# Altium PCB PCBcadcamcuoiki.PcbDoc
Units mm, origin at the board's own origin, x right, y up, seen from the top; angles counter-clockwise.
Board outline 92.58 x 78.87 mm, 2 copper layers (Top Layer, Bottom Layer); 31 components, 20 nets, 74 pads, 0 vias.
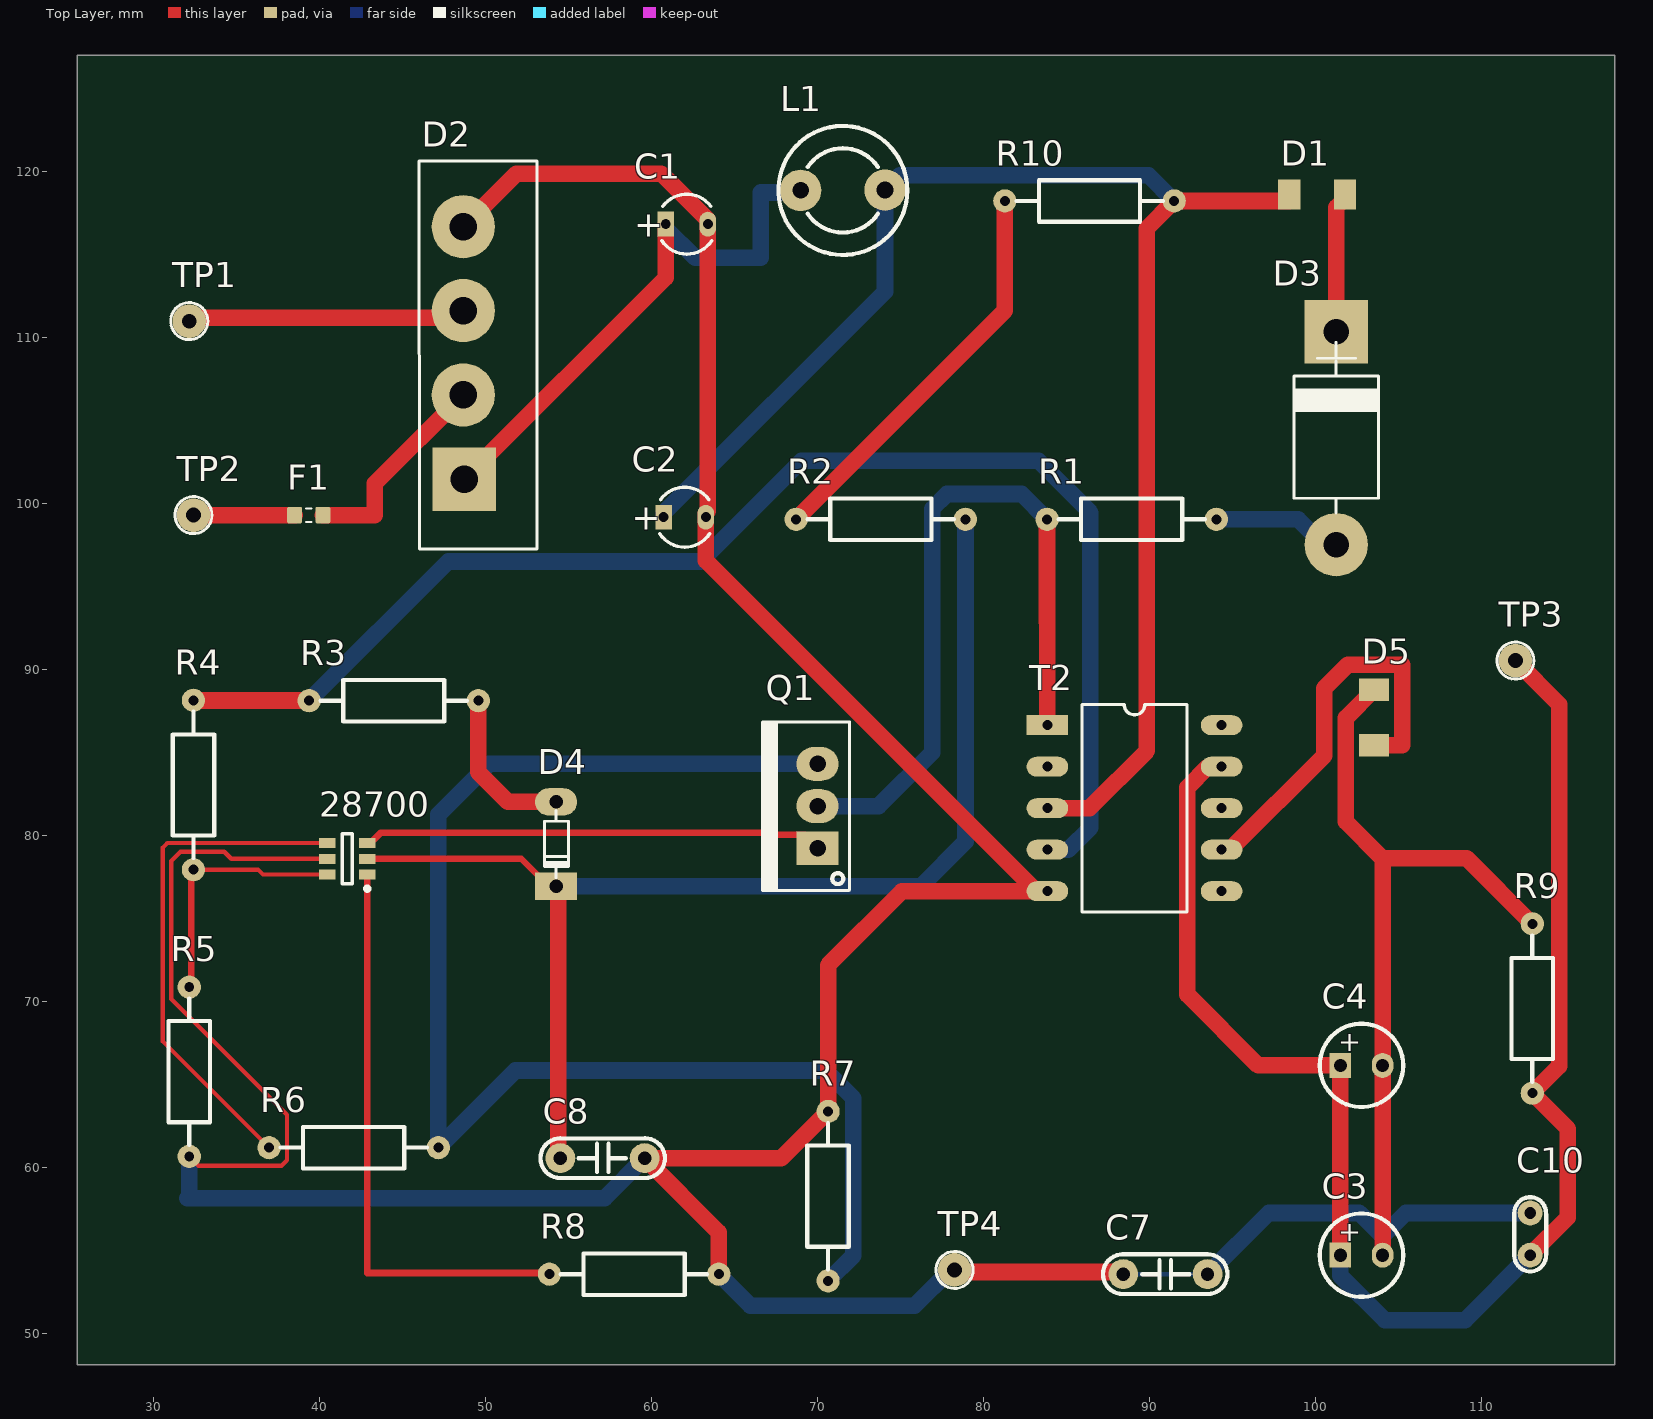
[diagram p0: Top Layer view]
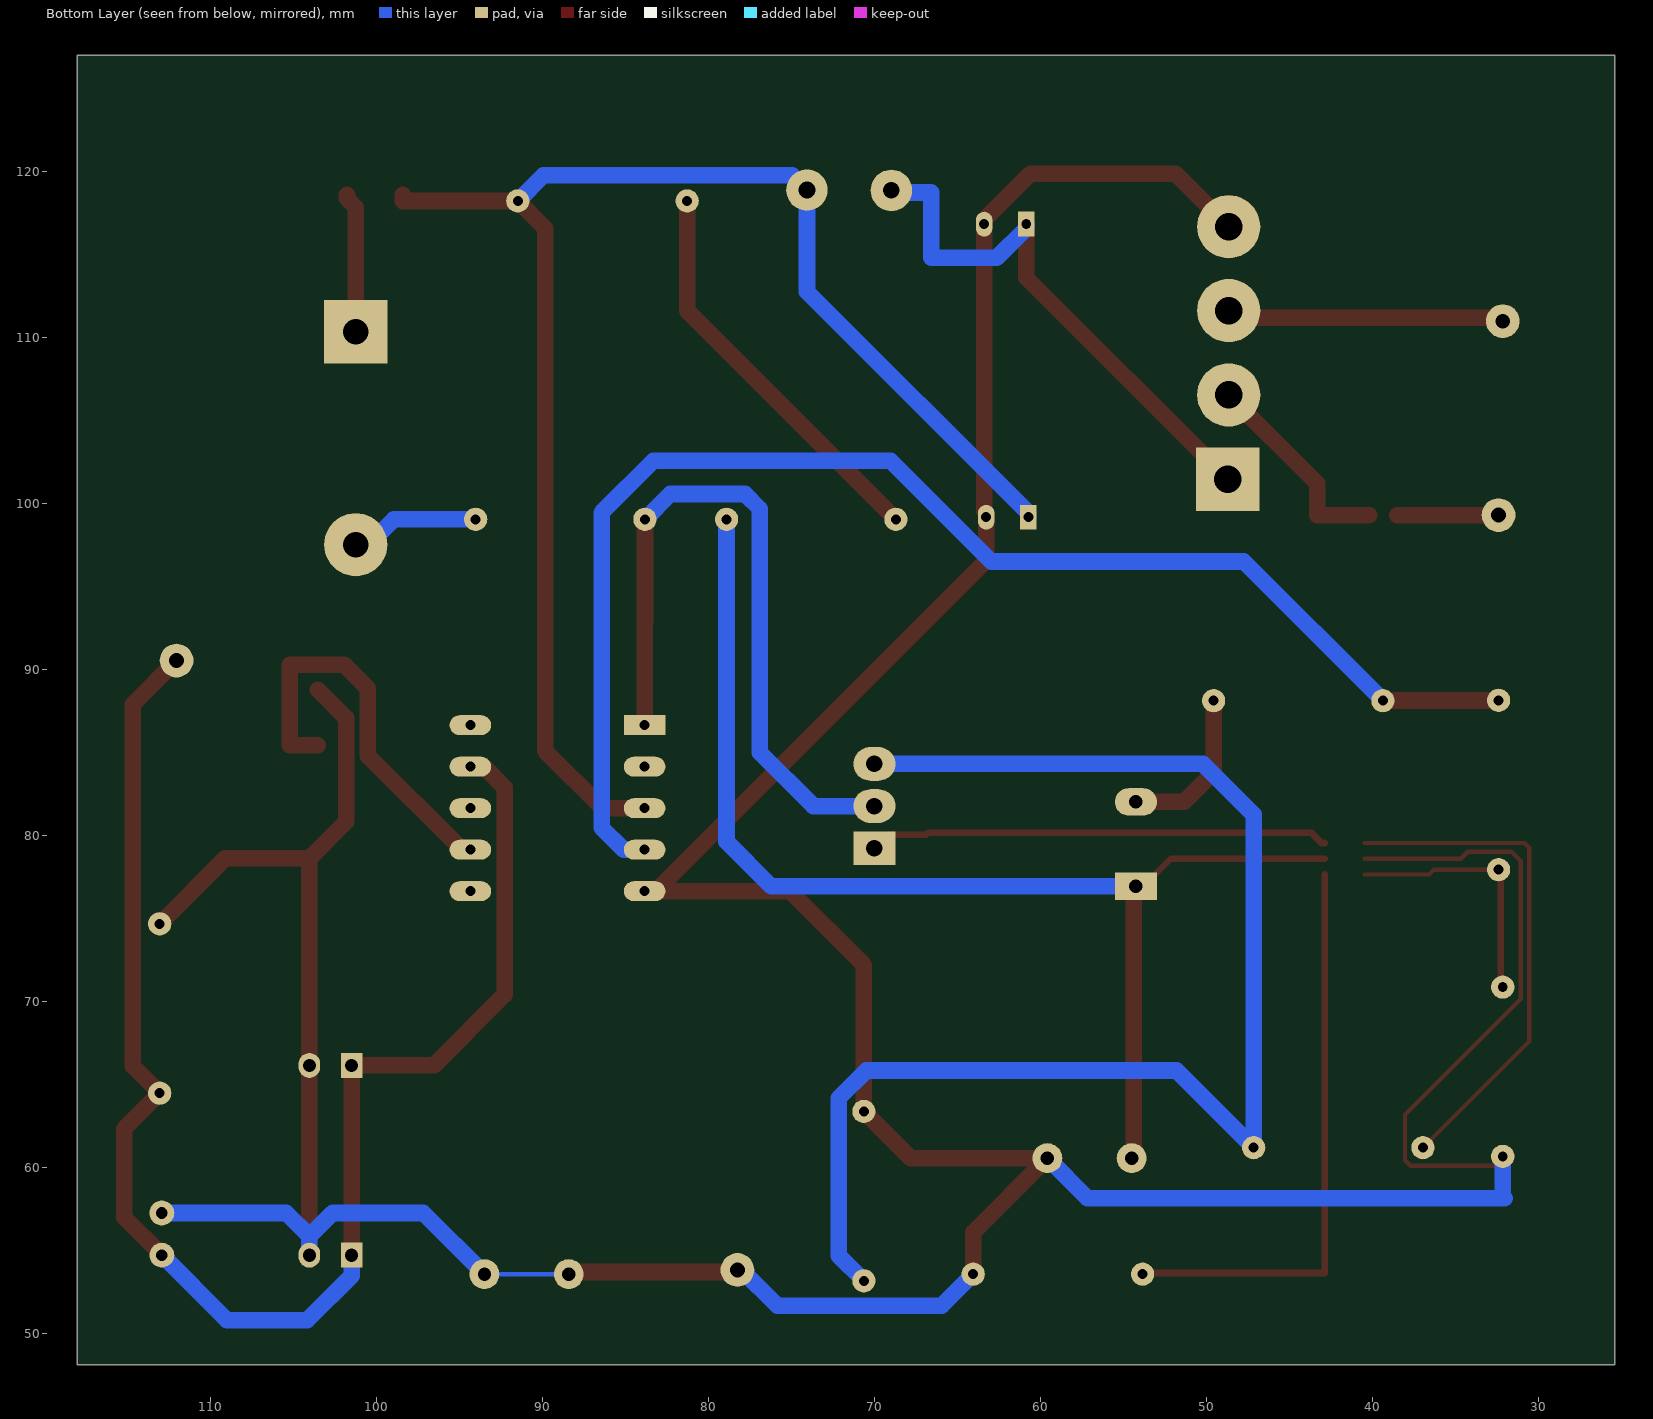
[diagram p1: Bottom Layer view, seen from below]
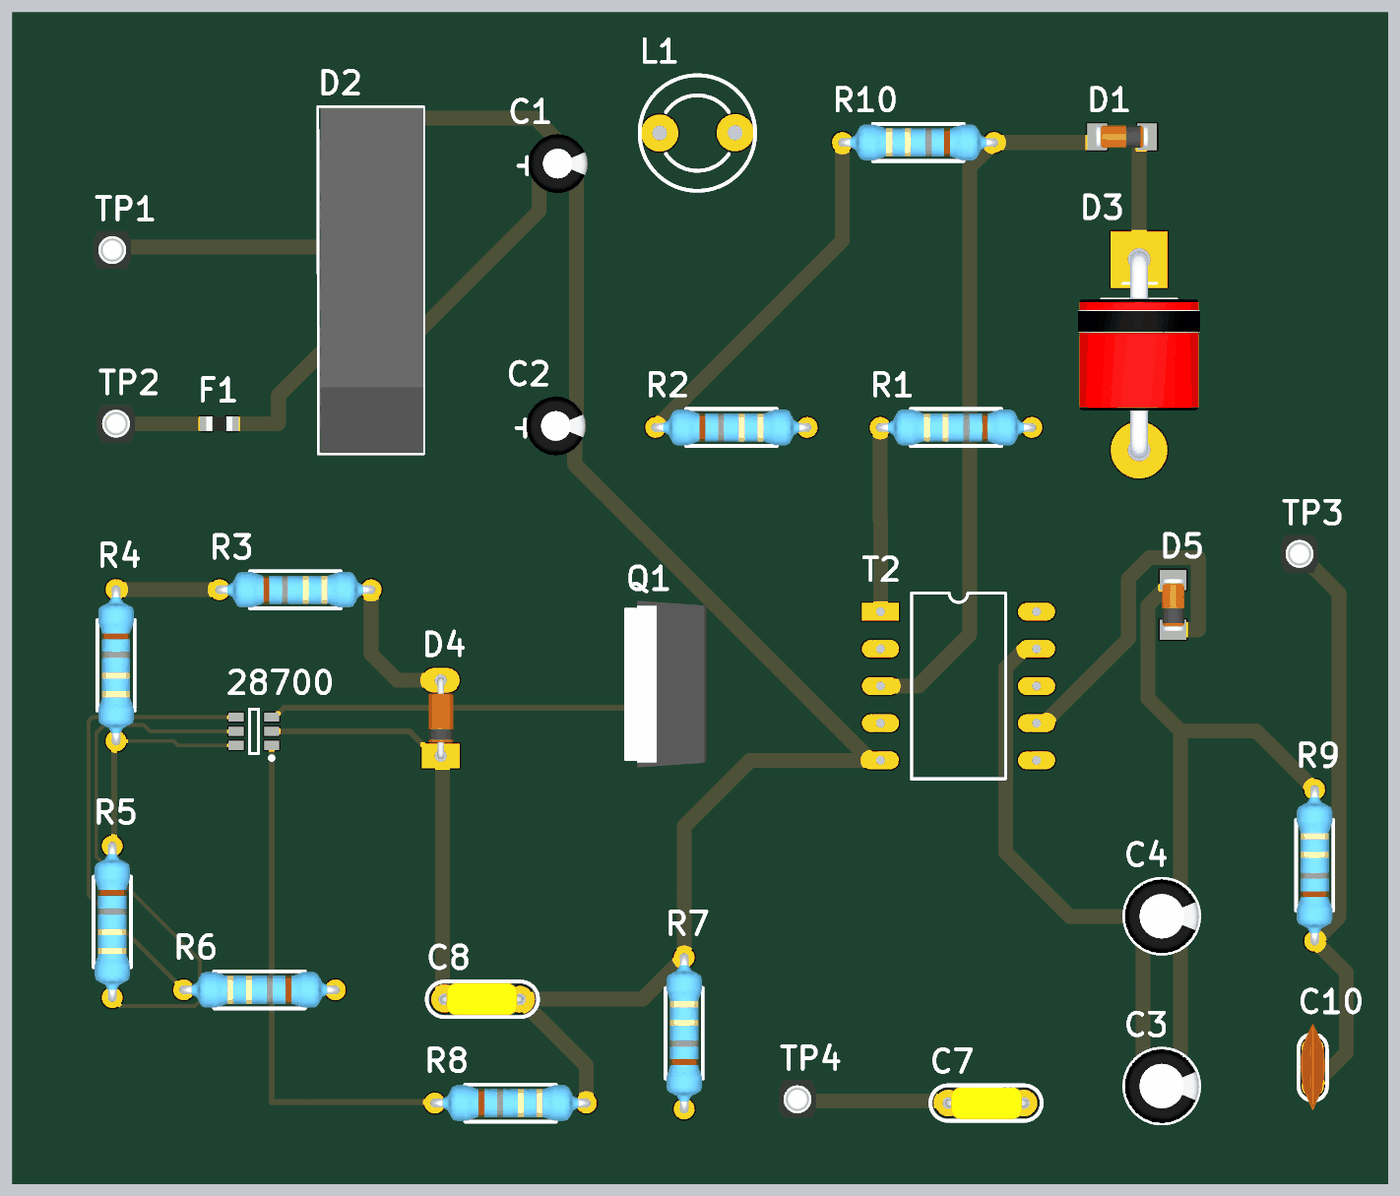
[diagram p2: 3D render of the assembled board from above, using the file's embedded part models]

## Layer stack, top to bottom
Top Solder: solder mask 0.0102, Solder Resist, Dk 3.5
Top Layer: signal copper 0.0356
Dielectric 1: dielectric 0.32, FR-4, Dk 4.8
Bottom Layer: signal copper 0.0356
Bottom Solder: solder mask 0.0102, Solder Resist, Dk 3.5

## Board outline
25.4,48.133 117.983,48.133 117.983,127 25.4,127

## Design rules (kind name [scope] priority, off if disabled: settings)
Clearance [All] p1: gap=0.3 ignorepadtopadclearanceinfootprint=FALSE
PolygonConnect [All] p1: connectstyle=Relief reliefconductorwidth=0.254 reliefentries=4 polygonreliefangle="90 Angle" airgapwidth=0.254
RoutingVias [All] p1: holewidth=0.711 width=1.27 viastyle="Through Hole" minholewidth=0.711 minwidth=1.27 maxholewidth=0.711 maxwidth=1.27
SolderMaskExpansion [All] p1: expansion=0.102 istentingtop=FALSE
Width [All] p1: maxlimit=1.5 minlimit=0.4 preferedwidth=1 bottomlayer_minwidth=0.5 minimp=50.000000 maximp=50.000000 favimp=50.000000
30 further rules are at their usual default settings.

## Components (designator, comment, footprint, x,y, rotation, side; value= is the part's Value field where it differs from the comment)
28700 "28700" SOT23(1) 41.656,78.613 r180 top
C1 "6.8uF 400V" C3MM 62.103,116.84 r0 top
C2 "6.8uF 400V" C3MM 61.976,99.187 r0 top
C3 "100uF 10V" C5mm 102.743,54.737 r0 top
C4 "1000uF 10V" C5mm 102.743,66.167 r0 top
C7 "220pF" "tu tantalum dip5.08" 90.932,53.594 r180 top
C8 "330nF" "Tu tantalum dip5.08" 57.023,60.579 r0 top
C10 "0.01uF" "tu gom" 112.903,56.007 r90 top
D1 "SMAJ120A" "DIODE ZENNER SMD SOD80" 100.076,118.618 r180 top
D2 "RH06-T" "DIODE CAU 10A CAM" 48.641,101.473 r90 top
D3 "MRA4007" "DIODE 7A" 101.219,103.378 r270 top
D4 "1N4148" "DIODE 0.5A" 54.229,79.502 r90 top
D5 "CDBC340" "DIODE ZENNER SMD SOD80" 103.505,87.122 r90 top
F1 "Fast Acting" RESC1608X55N 39.331,99.314 r0 top value=500mA
L1 "" "CUON CAM 200mil" 71.501,118.872 r0 top
Q1 "AOD2N60" QTO-220 69.977,79.248 r90 top value=IRF840
R1 "100" "tro vach 1/4w" 88.9,99.06 r0 top
R2 "10M" "tro vach 1/4w" 73.787,99.06 r180 top
R3 "49.9k" "tro vach 1/4w" 44.45,88.138 r180 top
R4 "100k" "tro vach 1/4w" 32.385,83.058 r90 top
R5 "28k" "tro vach 1/4w" 32.131,65.786 r90 top
R6 "2.8k" "tro vach 1/4w" 42.037,61.214 r0 top
R7 "1.3k" "tro vach 1/4w" 70.612,58.293 r270 top
R8 "49.9K" "tro vach 1/4w" 58.928,53.594 r180 top
R9 "2.61k" "tro vach 1/4w" 113.03,69.596 r270 top
R10 "10M" "tro vach 1/4w" 86.36,118.237 r0 top
T2 "750817011" 750817011 83.82,86.661 r0 top
TP1 "TP" TP1 32.131,110.998 r0 top value="Test Point"
TP2 "TP" TP1 32.385,99.314 r0 top value="Test Point"
TP3 "" TP1 112.014,90.551 r0 top value="Test Point"
TP4 "" TP1 78.232,53.848 r0 top value="Test Point"

## Footprints (in the part's own frame and the unit in brackets; to place one, negate y for a bottom-side part, rotate by r counter-clockwise, add the part's x,y. Pads: shape width x height; smd on the part's side, far side on the other; paste and mask are expansions set on the pad)
750817011 [mm]
  rect 2.5x1.2 hole 0.6: 1(0,0)
  oval 2.5x1.2 hole 0.6: 2(0,-2.5) 3(0,-5) 4(0,-7.5) 5(0,-10) 6(10.5,-10) 7(10.5,-7.5) 8(10.5,-5) 9(10.5,-2.5) 10(10.5,0)
  silkscreen extent 2.08,-11.25 8.42,1.25
C3MM [mm]
  rect 1x1.5 hole 0.6: 1(-1.27,0)
  oval 1x1.5 hole 0.6: 2(1.27,0)
  silkscreen extent -1.5,-1.81 1.5,1.8, body extent -2,-2.03 1.99,1.97, height 7.01
C5mm [mm]
  rect 1.3x1.5 hole 0.8: 1(-1.27,0)
  oval 1.3x1.5 hole 0.8: 2(1.27,0)
  silkscreen extent -2.51,-2.51 2.51,2.51, body extent -2.5,-2.5 2.49,2.5, height 11.01
"CUON CAM 200mil" [mm]
  round 2.5 hole 1: 1(-2.54,0) 2(2.54,0.025)
  silkscreen extent -3.88,-3.89 3.89,3.89
"DIODE 0.5A" [mil] "Diode muoi, xung"
  oval 65x100 hole 32: 1(100,0)
  rect 65x100 hole 32: 2(-100,0)
  silkscreen extent -80,-30 80,28, body extent -108,-33 108,32, height 61
"DIODE 7A" [mil] "Diode 7A"
  round 150 hole 60: 1(230,0)
  rect 150x150 hole 60: 2(-275,0)
  silkscreen extent -250,-100 155,100, body extent -296,-161 251,161, height 319
"DIODE CAU 10A CAM" [mil] "DIODE CAU 10A CAM"
  rect 150x150 hole 65: 1(0,-2)
  round 150 hole 65: 2(200,0) 3(400,0) 4(599,0)
  silkscreen extent -165,-175 755,105, body extent -162,-174 752,100, height 931
"DIODE ZENNER SMD SOD80" [mm] "SOD80"
  rect 1.35x1.8 smd: 1(1.675,0) 2(-1.675,0)
  body extent -1.75,-0.76 1.75,0.74, height 1.45
QTO-220 [mil] "TO-220 - 1-2-3"
  rect 80x100 hole 39: 1(0,0)
  oval 80x100 hole 39: 2(100,0) 3(200,0)
  silkscreen extent -100,-76 300,130, body extent -121,-85 321,100, height 755
RESC1608X55N [mm] "Chip Resistor, Body 1.6x0.8mm, EIA 0603, IPC Medium Density"
  round 0.254 on Mech15: 0(0,0)
  rrect25% 0.9x1 smd: 1(-0.85,0) 2(0.85,0)
  Top Layer pour cut-out: -0.6,0.5 -0.4,0.7 0.4,0.7 0.6,0.5 0.6,-0.5 0.4,-0.7 -0.4,-0.7 -0.6,-0.5
  silkscreen extent -0.15,-0.41 0.15,0.41, body extent -0.87,-0.47 0.88,0.48, height 0.54
SOT23(1) [mm] "SOT23, 6-Leads, Body 2,90x2,45mm, Pitch 0,95mm, IPC Medium Density"
  rect 1x0.6 smd: 1(-1.2,0.95) 2(-1.2,0) 3(-1.2,-0.95) 4(1.2,-0.95) 5(1.2,0) 6(1.2,0.95)
  silkscreen extent -1.33,-1.5 0.3,1.92, body extent -0.7,-1.5 0.7,1.5, height 1.1
TP1 [mil] "Test point"
  round 80 hole 35: 1(0,0)
  silkscreen extent -44,-44 44,44, body extent -50,-50 50,50, height 178
"tro vach 1/4w" [mm]
  round 1.4 hole 0.6: 1(-5.1,0) 2(5.1,0)
  silkscreen extent -4.39,-1.25 4.42,1.25, body extent -5.38,-1.2 5.38,1.2, height 2.41
"tu gom" [mm] "Tu gom mini"
  round 1.5 hole 0.7: 1(-1.27,0) 2(1.27,0)
  silkscreen extent -2.25,-0.97 2.22,0.97, body extent -2.92,-0.85 2.92,0.85, height 6.12
"tu tantalum dip5.08" [mm]
  round 1.8 hole 0.8: 1(-2.54,0) 2(2.54,0)
  silkscreen extent -3.74,-1.2 3.76,1.2, body extent -2.82,-1.08 2.77,1.08, height 6.27
"Tu tantalum dip5.08" [mm]
  round 1.8 hole 0.8: 1(-2.54,0) 2(2.54,0)
  silkscreen extent -3.74,-1.2 3.76,1.2, body extent -2.82,-1.08 2.77,1.08, height 6.27

## Part data
C1 C2: library part "Cap Pol 3mm", "Polarized Capacitor (Axial)", LatestRevisionDate=17-Jul-2002, LatestRevisionNote="Re-released for DXP Platform.", PackageReference=POLAR0.8, Published=8-Jun-2000, Publisher="Altium Limited"
C3 C4: library part "Cap Pol 5mm", "Polarized Capacitor (Axial)", LatestRevisionDate=17-Jul-2002, LatestRevisionNote="Re-released for DXP Platform.", PackageReference=POLAR0.8, Published=8-Jun-2000, Publisher="Altium Limited"
C7: library part "Tu tantalum 220pF 50V 5% DIP5.08", "Cắm", Chung_Loai=Cắm, Don_Vi=Con, Ma_Hang=MH008696, So_Chan=2, Ten_Linh_Kien="Tụ tantalum 221-220P 50V 5% DIP5.08 (sứ vàng-10PCS)"
C8: library part "Tu tantalum 330nF 50V 20% DIP5.08", "Cắm", Chung_Loai=Cắm, Don_Vi=Con, Ma_Hang=MH003963, So_Chan=2, Ten_Linh_Kien="Tụ tantalum 334-330nF 50V 20% DIP5.08 (sứ vàng) (10PCS)"
C10: library part "Tu gom 100 50V", "Cắm", Chung_Loai=Cắm, Don_Vi=Con, Ma_Hang=MH004765, So_Chan=2, Ten_Linh_Kien="Tụ gốm 100 10pF 50V"
D1 D5: library part "Diode Zener 24V", "Cắm", Chung_Loai=Cắm, Don_Vi=Con, Ma_Hang=MH002878, Ten_Linh_Kien="Diode Zener 1/2W 24V DIP 1N5252B"
D2: library part "Diode CAU 10A", "Cắm", Chung_Loai=cắm, Don_Vi=Con, Ma_Hang=MH004295, Ten_Linh_Kien="Diode Cầu 10A 1000V KBU1010"
D3: library part "Diode 6A 1000V", "Cắm", Chung_Loai=Cắm, Don_Vi=Con, Ma_Hang=MH006103, Ten_Linh_Kien="Diode 6A10 6A 1000V (DIP)"
D4: library part "Diode 1N4148", "Cắm", Chung_Loai=Cắm, Don_Vi=Con, Ma_Hang=MH001065, Ten_Linh_Kien="Diode 1N4148 DO35 450mA 100V ( 1N4148 DIP)"
F1: library part FUSE_FAST_500mA_0603, "Fuse 500mA 32VDC 0603 SMD", DC Cold Resistance="0.25 Ohm", Manufacturer 1="AVX Corporation", Manufacturer Part Number 1=F0603E0R50FSTR, Operating Temperature="-55°C ~ 125°C", Package / Case="0603 (1608 metric)", Ratings="500mA; 32VDC; fast acting", Supplier Part Number 1=478-2860-1-ND, ComponentLink1Description=http://www.avx.com/docs/Catalogs/accug2.pdf, ComponentLink1URL=http://www.avx.com/docs/Catalogs/accug2.pdf, Fuse Type="Fast Acting", SCDType=source, Supplier 1=Digi-Key
L1: library part Conductor
Q1: library part IRF840, "MOSFET N - CHANNEL 500V - 0.75 - 8A - TO-220"
R1 R4: library part "Tro Vach 1/4W 5% 100k", "Cắm", Chung_Loai=Cắm, Don_Vi=Con, Ma_Hang=MH007352, So_Chan=2, Ten_Linh_Kien="Trở Vạch 1/4w 5% 100k"
R2 R10: library part "Tro Vach 1/4W 5% 10M", "Cắm", Chung_Loai=Cắm, Don_Vi=Con, Ma_Hang=MH007385, So_Chan=2, Ten_Linh_Kien="Trở Vạch 1/4w 5% 10M"
R3 R8: library part "Tro Vach 1/4W 5% 51k", "Cắm", Chung_Loai=Cắm, Don_Vi=Con, Ma_Hang=MH007326, So_Chan=2, Ten_Linh_Kien="Trở Vạch 1/4w 5% 51k"
R5: library part "Tro Vach 1/4W 5% 30k", "Cắm", Chung_Loai=Cắm, Don_Vi=Con, Ma_Hang=MH007310, So_Chan=2, Ten_Linh_Kien="Trở Vạch 1/4w 5% 30k"
R6: library part "Tro Vach 1/4W 1% 3k", "Cắm", Chung_Loai=Cắm, Don_Vi=Con, Ma_Hang=MH008834, So_Chan=2, Ten_Linh_Kien="Trở Vạch 1/4W 1% 3k"
R7: library part "Tro Vach 1/4W 5% 1.5k", "Cắm", Chung_Loai=Cắm, Don_Vi=Con, Ma_Hang=MH007284, So_Chan=2, Ten_Linh_Kien="Trở Vạch 1/4w 5% 1.5k"
R9: library part "Tro Vach 1/4W 5% 2.7k", "Cắm", Chung_Loai=Cắm, Don_Vi=Con, Ma_Hang=MH007294, So_Chan=2, Ten_Linh_Kien="Trở Vạch 1/4w 5% 2.7k"
TP1 TP2 TP3 TP4: library part TP1, "Test Point"

## Nets (pads, with @x,y where several pads share a name; then routed paths per layer and width w, separated by ;. In a path a pad name is that pad's centre, name@x,y a point inside that pad or via, vN(x,y) a via of type N, cw(c..) or ccw(c..) an arc to the next point about the centre after c; other vN are vias at no path point)
GND: 28700.5 C1.2 C2.2 C3.2 C4.2 C7.1 C7.2 C8.2 C10.2 D2.4 D5.1 R5.1 R7.1 R8.1 R9.1 T2.5 TP4.1 | length 279.6
  Top Layer w0.254: R5.1 32.695,60.122 37.694,60.122 38.024,60.452 38.024,63.195 31.05,70.169 31.05,78.486 31.603,79.039 34.239,79.039 34.665,78.613 28700.5
  Top Layer w1: D2.4 51.841,119.888 60.575,119.888 63.373,117.09 C1.2 63.373,99.564 63.246,99.437 C2.2 63.246,96.575 T2.5@83.16,76.661 ; R8.1 64.028,56.114 C8.2 67.798,60.579 R7.1 70.612,72.212 75.061,76.661 T2.5@83.16,76.661 ; TP4.1 78.359,53.721 88.265,53.721 C7.2 ; T2.5 T2.5@83.16,76.661 ; D5.1 101.805,87.097 101.805,80.846 104.013,78.638 ; C3.2 C4.2 104.013,78.638 ; R9.1 109.088,78.638 104.013,78.638
  Bottom Layer w0.254: C7.2 C7.1
  Bottom Layer w1: 32.004,58.166 57.15,58.166 C8.2 ; 32.131,58.293 R5.1 ; R8.1 65.933,51.689 75.819,51.689 77.978,53.848 TP4.1 ; C7.1 97.155,57.277 102.616,57.277 104.013,55.88 ; C3.2 104.013,55.88 ; C10.2 105.41,57.277 104.013,55.88
Net28700_1: 28700.1 R8.2 | length 35
  Top Layer w0.254: 28700.1@42.85,77.663 28700.1
  Top Layer w0.4: 28700.1 42.856,53.664 53.758,53.664 R8.2
Net28700_2: 28700.2 C8.1 D4.2 R2.1 | length 73.7
  Top Layer w0.4: 28700.2 52.133,78.613 53.785,76.962 D4.2
  Top Layer w1: D4.2 54.356,76.835 54.356,60.706 C8.1
  Bottom Layer w1: D4.2 76.2,76.962 78.887,79.649 R2.1
Net28700_3: 28700.3 Q1.1 | length 27.8
  Top Layer w0.4: 28700.3 43.056,79.563 43.684,80.191 66.729,80.191 66.856,80.064 69.161,80.064 Q1.1
Net28700_4: 28700.4 R6.1 | length 30.8
  Top Layer w0.254: R6.1 30.542,67.609 30.542,79.293 30.812,79.563 28700.4
Net28700_6: 28700.6 R4.1 R5.2 | length 15.4
  Top Layer w0.254: R4.1 36.271,77.958 36.566,77.663 28700.6
  Top Layer w0.4: R5.2 32.258,71.013 32.258,77.831 R4.1
NetC1_1: C1.1 D2.1 L1.1 | length 33.5
  Top Layer w1: D2.1 60.833,113.614 C1.1
  Bottom Layer w1: C1.1 60.833,116.59 62.615,114.808 66.548,114.808 66.548,118.745 68.834,118.745 L1.1
NetC2_1: C2.1 D1.1 L1.2 R10.2 T2.3 | length 92.2
  Top Layer w1: T2.3 86.36,81.661 89.814,85.115 89.814,116.591 R10.2 98.401,118.237 D1.1
  Bottom Layer w1: C2.1 60.706,99.437 74.041,112.772 L1.2 74.93,119.786 89.911,119.786 R10.2
NetC3_1: C3.1 C4.1 C10.1 R9.2 T2.9 TP3.1 | length 92.3
  Top Layer w1: T2.9 93.508,84.161 92.253,82.906 92.253,70.434 96.52,66.167 C4.1 C3.1 ; TP3.1 114.656,87.909 114.656,66.122 R9.2 115.169,62.357 115.169,57.003 C10.1
  Bottom Layer w1: C3.1 101.473,53.492 104.14,50.825 108.991,50.825 C10.1
NetD1_2: D1.2 D3.2 | length 8.5
  Top Layer w1: D3.2 101.219,117.861 101.751,118.393 D1.2
NetD2_2: D2.2 F1.2 | length 12.6
  Top Layer w1: F1.2 43.307,99.314 43.307,101.219 D2.2
NetD2_3: D2.3 TP1.1 | length 16.8
  Top Layer w1: TP1.1 32.328,111.195 48.203,111.195 D2.3
NetD3_1: D3.1 R1.2 | length 7.9
  Bottom Layer w1: R1.2 98.935,99.06 100.459,97.536 D3.1
NetD4_1: D4.1 R3.1 | length 9.7
  Top Layer w1: R3.1 49.55,83.82 51.328,82.042 D4.1
NetD5_2: D5.2 T2.7 | length 24.4
  Top Layer w1: T2.7 94.833,79.161 100.505,84.833 100.505,88.897 101.905,90.297 105.207,90.297 105.207,85.447 D5.2
NetF1_1: F1.1 TP2.1 | length 6.1
  Top Layer w1: TP2.1 F1.1
NetQ1_2: Q1.2 R1.1 T2.1 | length 43.2
  Top Layer w1: R1.1 83.8,92.857 83.82,92.837 T2.1
  Bottom Layer w1: Q1.2 73.66,81.788 76.886,85.014 76.886,99.695 77.775,100.584 82.276,100.584 R1.1
NetQ1_3: Q1.3 R6.2 R7.2 | length 83.4
  Bottom Layer w1: Q1.3 50.185,84.328 47.137,81.28 R6.2 51.785,65.862 70.46,65.862 72.136,64.186 72.136,54.717 R7.2
NetR2_2: R2.2 R10.1 | length 24.4
  Top Layer w1: R2.2 81.26,111.633 R10.1
NetR3_2: R3.2 R4.2 T2.4 | length 83.4
  Top Layer w1: R4.2 32.395,88.148 39.34,88.148 R3.2
  Bottom Layer w1: R3.2 47.732,96.52 62.941,96.52 69.012,102.591 83.287,102.591 86.411,99.466 86.411,80.482 85.09,79.161 T2.4
pads on no net: F1.0 T2.2 T2.6 T2.8 T2.10

## Text inside footprints (layer, text, board x,y; h text height)
C1: Top Overlay "+" at 58.928,116.078 h1.52
C2: Top Overlay "+" at 58.801,98.425 h1.52
C3: Top Overlay "+" at 101.346,55.575 h1.2
C4: Top Overlay "+" at 101.346,67.005 h1.2